# Altium PCB vtg regulator using TPS793.PcbDoc
Units mm, origin at the board's own origin, x right, y up, seen from the top; angles counter-clockwise.
Board outline 35.4 x 11.6 mm, 2 copper layers (Top Layer, Bottom Layer), stack 1.671 mm thick; 10 components, 6 nets, 23 pads, 20 vias.
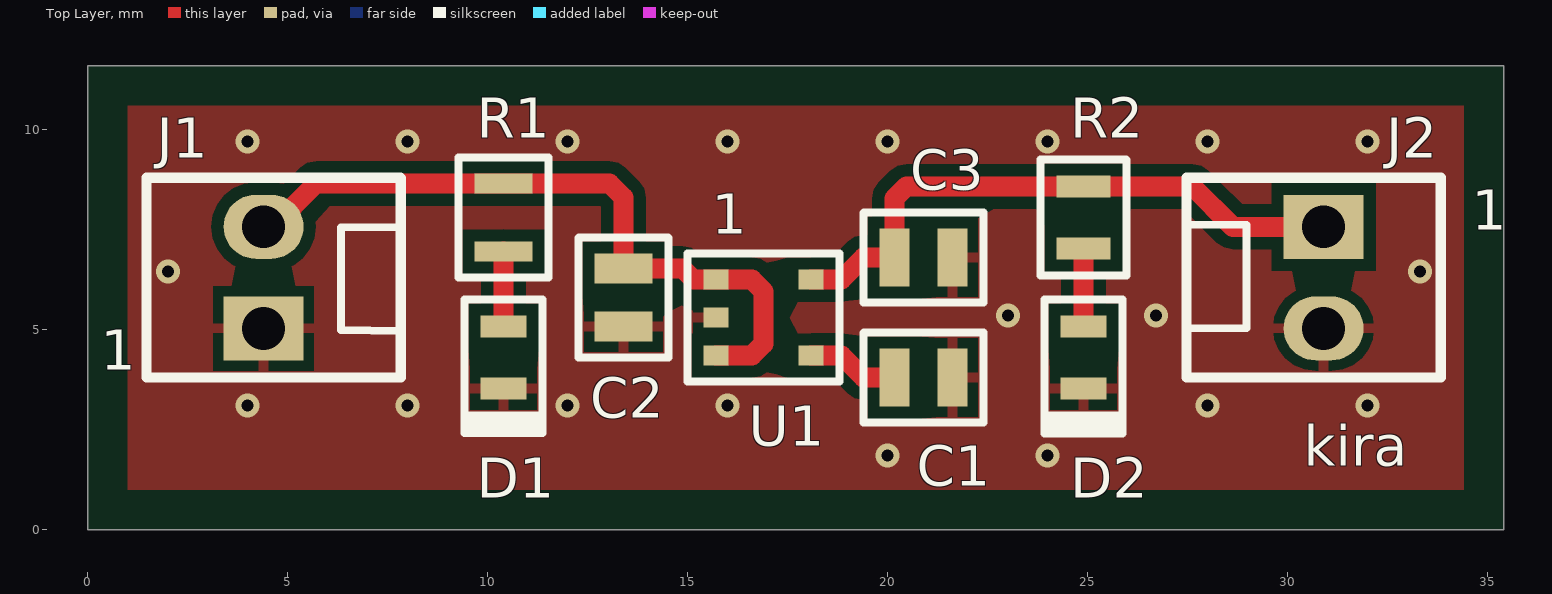
[diagram p0: Top Layer view]
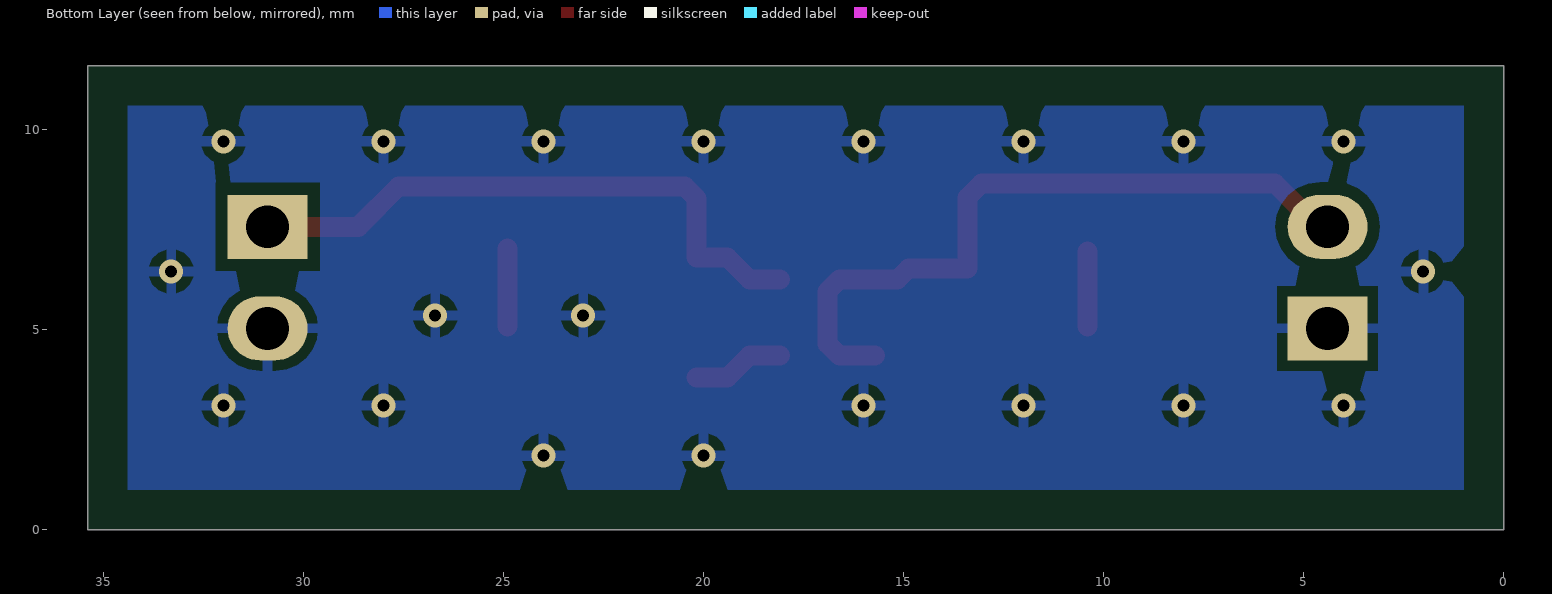
[diagram p1: Bottom Layer view, seen from below]
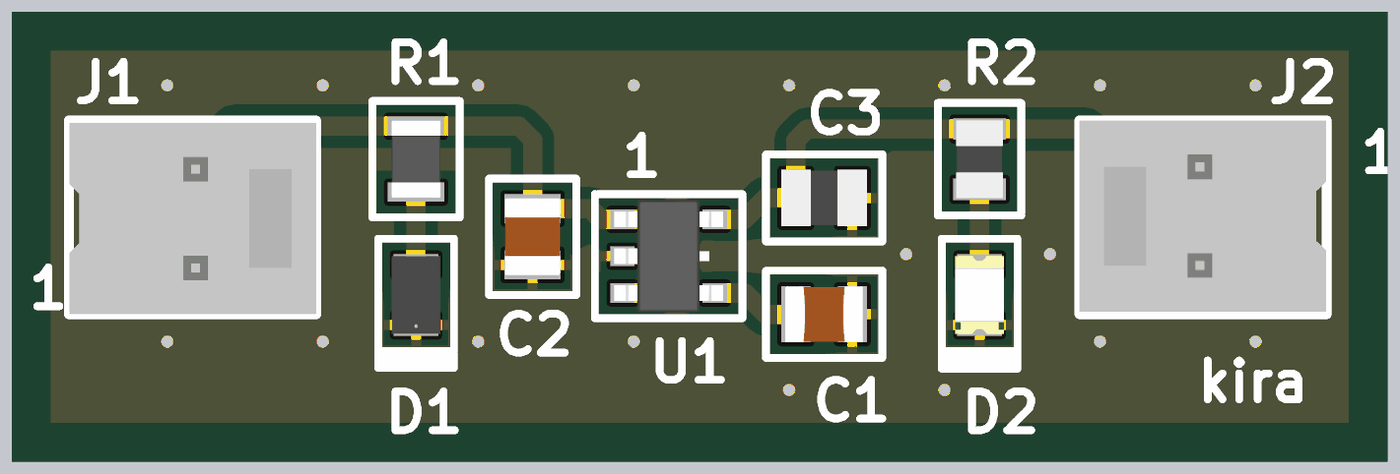
[diagram p2: 3D render of the assembled board from above, using the file's embedded part models]

## Layer stack, top to bottom
Top Solder: solder mask 0.0102, Solder Resist, Dk 3.5
Top Layer: signal copper 0.0356
Dielectric 1: dielectric 1.6, FR-4, Dk 4.8
Bottom Layer: signal copper 0.0356
Bottom Solder: solder mask 0.0102, Solder Resist, Dk 3.5

## Board outline
0,11.6 35.4,11.6 35.4,0 0,0

## Design rules (kind name [scope] priority, off if disabled: settings)
Clearance [All] p1: gap=0.3 ignorepadtopadclearanceinfootprint=TRUE except(0.2: SMDPad-SMDPad)
MinimumSolderMaskSliver [All] p1: minsoldermaskwidth=0.2
PolygonConnect [All] p1: connectstyle=Relief reliefconductorwidth=0.254 reliefentries=4 polygonreliefangle="90 Angle" airgapwidth=0.254
RoutingVias [All] p1: holewidth=0.3 width=0.69 viastyle="Through Hole" minholewidth=0.3 minwidth=0.6 maxholewidth=0.3 maxwidth=0.6
SolderMaskExpansion [All] p1: expansion=0.102 istentingtop=FALSE
SupplyNets "Schematic Supply Nets" [InNet('GND')] p1: voltage=0.000
Width [All] p1: maxlimit=1 minlimit=0.5 preferedwidth=0.5
29 further rules are at their usual default settings.

## Components (designator, comment, footprint, x,y, rotation, side; value= is the part's Value field where it differs from the comment)
C1 "Capacitor 0805 0.01uF" "CAPACITOR 0805 0.01UF" 20.9,3.8 r180 top
C2 "Capacitor 0805 0.1uF" "CAPACITOR 0805 0.1UF" 13.4,5.8 r90 top
C3 "Capacitor 0805 2.2uF" "CAPACITOR 0805 2.2UF" 20.9,6.8 r180 top
D1 "LED 0805 Red" "LED 0805 RED" 10.4,4.3 r270 top
D2 "LED 0805 Green" "LED 0805 GREEN" 24.9,4.3 r270 top
J1 "Generic Header, 1X2 Vertical" 22232021 4.4,6.3 r180 top
J2 "Generic Header, 1X2 Vertical" 22232021 30.9,6.3 r0 top
R1 "Resistor 0805 291R" "RESISTOR 0805 291R" 10.4,7.8 r90 top
R2 "Resistor 0805 300R" "RESISTOR 0805 300R" 24.9,7.8 r90 top
U1 "TPS793" TPS793 16.9,5.3 r0 top

## Footprints (in the part's own frame and the unit in brackets; to place one, negate y for a bottom-side part, rotate by r counter-clockwise, add the part's x,y. Pads: shape width x height; smd on the part's side, far side on the other; paste and mask are expansions set on the pad)
22232021 [mm]
  rect 2x1.6 hole 1.07 mask+0.102: 1(0,1.27)
  oval 2x1.6 hole 1.07 mask+0.102: 2(0,-1.27)
  silkscreen extent -3.43,-2.5 2.93,2.5, body extent -3.43,-2.43 2.92,2.49, height 10.68
"CAPACITOR 0805 0.01UF" [mm]
  rect 0.75x1.45 smd: 1(-0.725,0) 2(0.725,0)
  silkscreen extent -1.5,-1.12 1.5,1.12, body extent -1,-0.72 1,0.72, height 0.62
"CAPACITOR 0805 0.1UF" [mm]
  rect 0.75x1.45 smd: 1(-0.725,0) 2(0.725,0)
  silkscreen extent -1.5,-1.12 1.5,1.13, body extent -1,-0.72 1,0.72, height 0.63
"CAPACITOR 0805 2.2UF" [mm]
  rect 0.75x1.45 smd: 1(-0.725,0) 2(0.725,0)
  silkscreen extent -1.5,-1.12 1.5,1.12, body extent -1.1,-0.72 1.1,0.72, height 1.45
"LED 0805 GREEN" [mm]
  rect 0.55x1.15 smd: 1(0.775,0) 2(-0.775,0)
  silkscreen extent -1.45,-0.97 1.91,0.98, body extent -1,-0.63 1,0.63, height 0.81
"LED 0805 RED" [mm]
  rect 0.55x1.15 smd: 1(0.775,0) 2(-0.775,0)
  silkscreen extent -1.45,-0.97 1.89,0.97, body extent -1,-0.62 1,0.62, height 0.81
"RESISTOR 0805 291R" [mm]
  rect 0.5x1.45 smd: 1(-0.85,0) 2(0.85,0)
  silkscreen extent -1.5,-1.12 1.5,1.12, body extent -1,-0.63 1,0.63, height 0.61
"RESISTOR 0805 300R" [mm]
  rect 0.55x1.35 smd: 1(-0.775,0) 2(0.775,0)
  silkscreen extent -1.45,-1.07 1.45,1.07, body extent -1,-0.6 1,0.6, height 0.71
TPS793 [mm]
  rect 0.625x0.5 smd: 1(-1.187,0.95) 2(-1.187,0) 3(-1.187,-0.95) 4(1.188,-0.95) 5(1.188,0.95)
  silkscreen extent -1.9,-1.6 1.9,1.6, body extent -1.4,-1.45 1.4,1.45, height 1.2

## Part data
C1: Capacitance=0.01uF, Dielectric=X7R, Manufacturer=Vishay, Package=0805, Part No=VJ0805Y103KXAAC, Voltage Rating=50VDC, Product Type="Ceramic Capacitors"
C2: Capacitance=0.1uF, Dielectric=X7R, Manufacturer=Vishay, Package=0805, Part No=VJ0805Y104KXAAT, Voltage Rating=50VDC, Product Type="Ceramic Capacitor"
C3: Capacitance=2.2uF, Dielectric=Y5V, Manufacturer=Vishay, Package=0805, Part No=VJ0805V225MXQTW1BC, Voltage Rating=10VDC, Product Type="Ceramic Capacitor"
D1: Colour=Red, Current Test=20mA, Forward Voltage Vf=2V, Manufacturer="Lite-On Inc", Package=0805, Part No=LTST-C171KRKT
D2: Colour=Green, Forward Voltage Vf=2.1V, Manufacturer="Lite-On Inc", Part No=LTST-C171GKT, Test Current=20mA, Pacakage=0805
J1 J2: library part 22232021, Current max per contact=4A, Manufacturer=Molex, Voltage max=500V, Component Type="PCB Header", Part No=22232021, Pitch=2.54mm, Product Category="PCB Headers and Receptacles", Product Name=KK254, Series No=6373
R1: Manufacturer="KOA Speer Electronics Inc", Package=0805, Part No=(RN73R2ATTD2910B25), Resistance=291R, Tolerance=0.1%, Serier=RN73R
R2: Manufacturer=YAGEO, Package=0805, Part No=RC0805JR-07300RL, Resistance=300R, Series=RC_L
U1: library part "Regulator TPS793", Current Output=200mA, Manufacturer="Texas Instrument", Package=SOT-23-5, Part No=TPS79333DBVRQ1, Output Configuration=Positive, Output type=Fixed, Vtg Input=5.5V, Vtg Output=3.3V

## Via types
v1: diameter 0.6, hole 0.3, Top Layer to Bottom Layer, tented both sides, 20 vias

## Nets (pads, with @x,y where several pads share a name; then routed paths per layer and width w, separated by ;. In a path a pad name is that pad's centre, name@x,y a point inside that pad or via, vN(x,y) a via of type N, cw(c..) or ccw(c..) an arc to the next point about the centre after c; other vN are vias at no path point)
BYPASS: C1.2 U1.4 | length 2.3
  Top Layer w0.5: U1.4 18.85,4.35 19.4,3.8 C1.2
GND: C1.1 C2.1 C3.1 D1.1 D2.1 J1.1 J2.2 U1.2 | length 0.2
  Top Layer w0.5: J1.1 J1.1@4.6,5.03
  other v1: 20,1.851 24,1.851 4,3.1 8,3.1 12,3.1 16,3.1 28,3.1 32,3.1 23.011,5.351 26.711,5.351 2.011,6.451 33.311,6.451 4,9.7 8,9.7 12,9.7 16,9.7 20,9.7 24,9.7 28,9.7 32,9.7
INPUT: C2.2 J1.2 R1.2 U1.1 U1.3 | length 17.7
  Top Layer w0.5: J1.2 4.632,7.57 5.712,8.65 R1.2 13.05,8.65 13.4,8.3 C2.2 14.875,6.525 15.15,6.25 16.607,6.25 16.9,5.957 16.9,4.643 16.607,4.35 U1.3
NetD1_2: D1.2 R1.1 | length 1.9
  Top Layer w0.5: D1.2 R1.1
NetD2_2: D2.2 R2.1 | length 2
  Top Layer w0.5: D2.2 R2.1
OUTPUT: C3.2 J2.1 R2.2 U1.5 | length 15.1
  Top Layer w0.5: U1.5 18.85,6.25 19.4,6.8 C3.2 20.175,8.282 20.468,8.575 R2.2 27.625,8.575 28.63,7.57 J2.1

## Polygon pours and split planes (outlines as drawn)
GND on Top Layer "GND_L01_P001" (solid, remove dead copper, pour order 1): 1,10.6 34.4,10.6 34.4,1 1,1
GND on Top Layer "GND_L01_P000" (solid, remove dead copper, pour order 0): 1,10.6 34.4,10.6 34.4,1 1,1
GND on Bottom Layer "GND_L02_P002" (solid, remove dead copper, pour order 2): 1,10.6 34.4,10.6 34.4,1 1,1

## Silkscreen, mask and mechanical layers (free items; w line width, h text height)
Top Overlay:
  text "kira" at 30.4,1.6 h1
Board Outline:
  the board outline again, w0.1

## Text inside footprints (layer, text, board x,y; h text height)
J1: Top Overlay "1" at 0.33,4 h1
J2: Top Overlay "1" at 34.6,7.5 h1
U1: Mechanical 29 "1" at 14.44,6.18 h0.7; Top Overlay "1" at 15.6,7.4 h1